# Altium PCB PCB1.PcbDoc
Units mm, origin at the board's own origin, x right, y up, seen from the top; angles counter-clockwise.
Board outline 119.76 x 74.42 mm, 2 copper layers (Top Layer, Bottom Layer); 30 components, 44 nets, 148 pads, 45 vias.
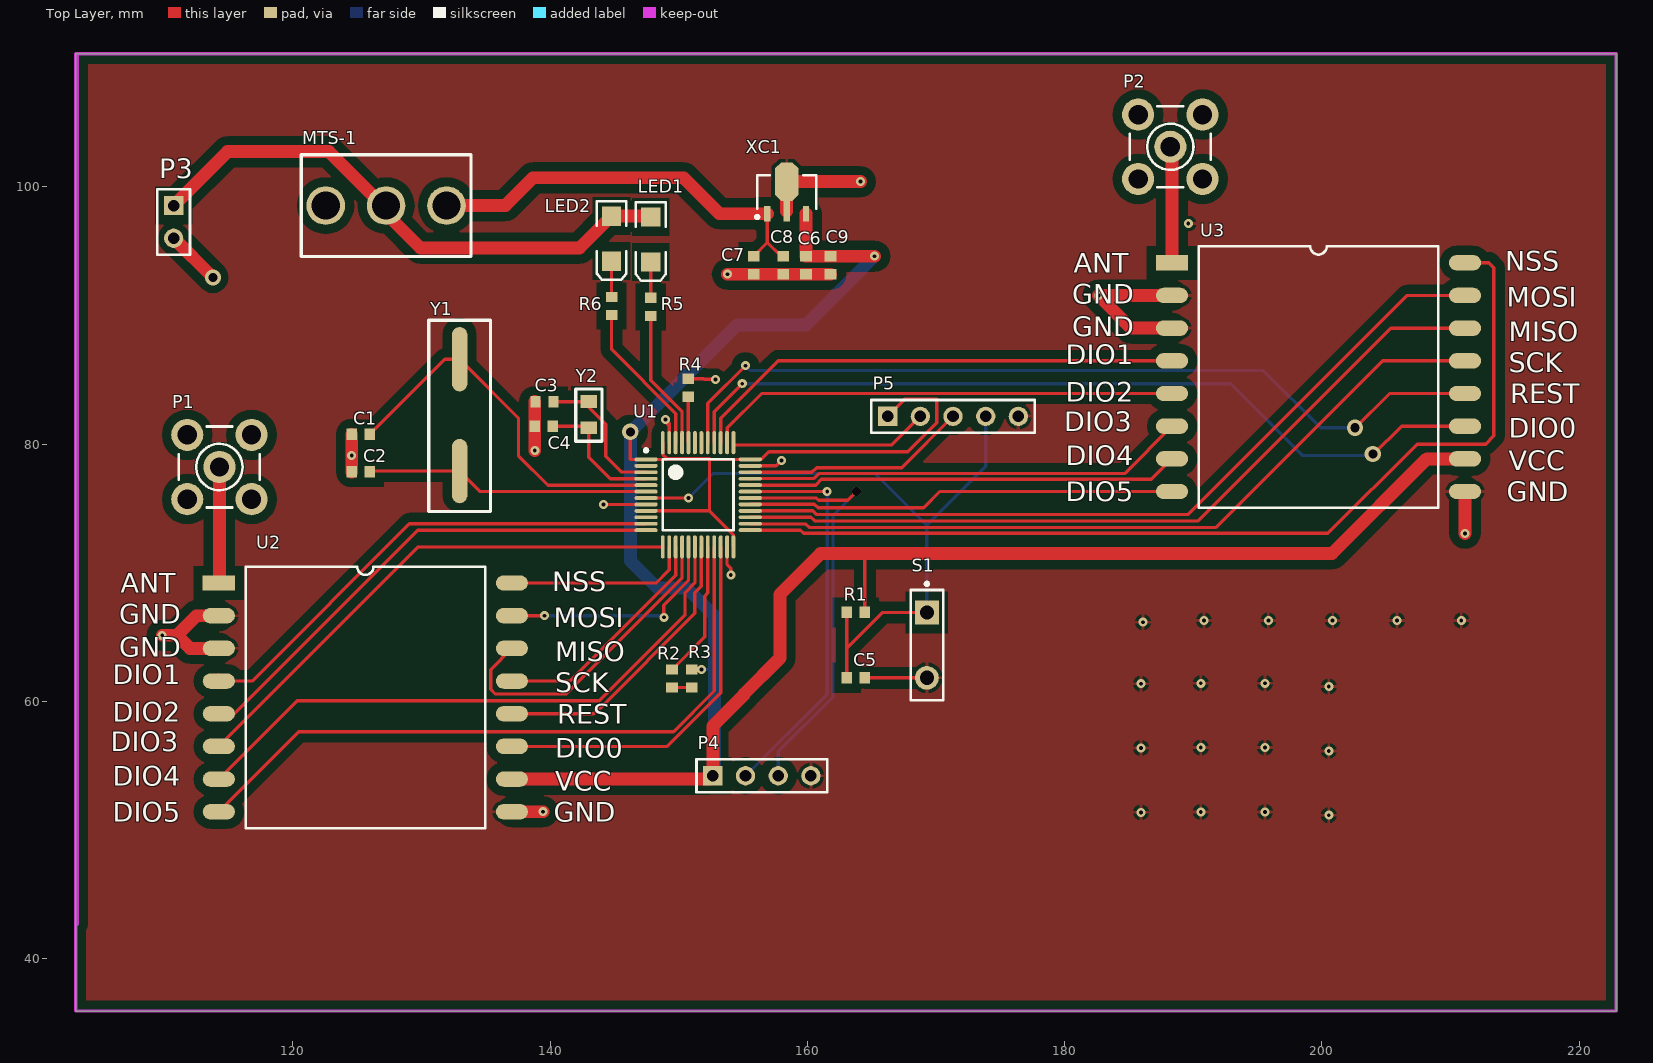
[diagram p0: Top Layer view]
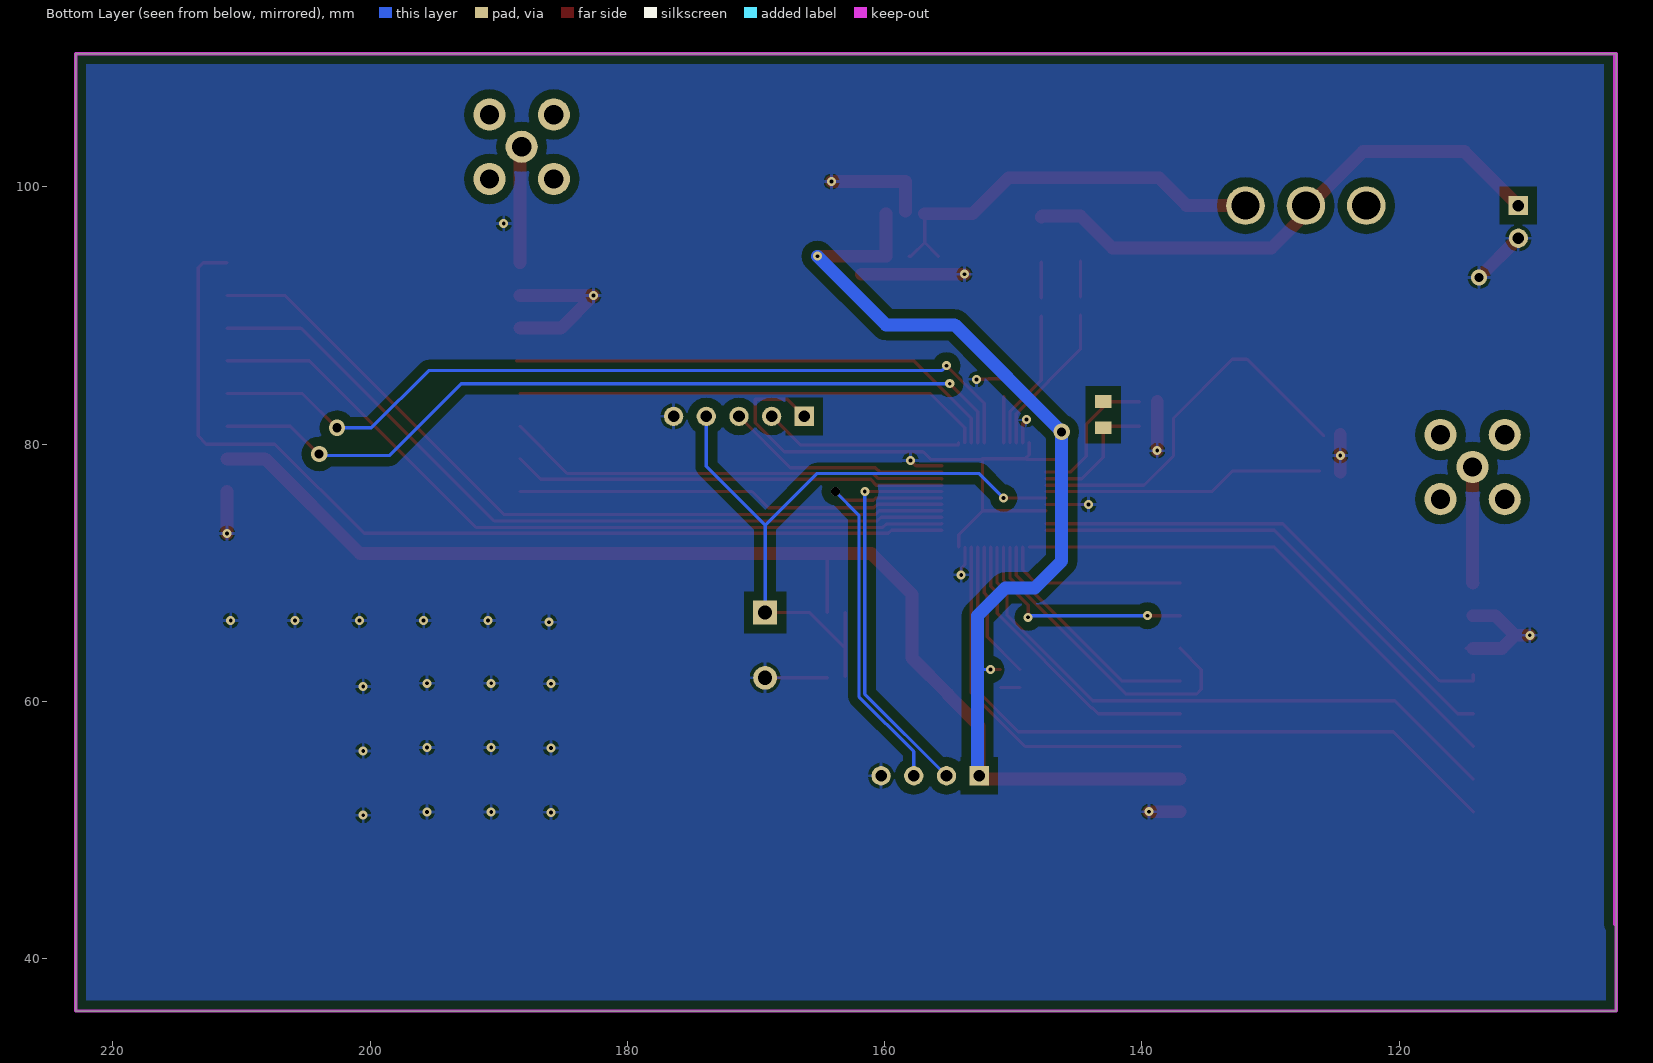
[diagram p1: Bottom Layer view, seen from below]

## Layer stack, top to bottom
Top Solder: solder mask 0.0102, Solder Resist, Dk 3.5
Top Layer: signal copper 0.0356
Dielectric 1: dielectric 0.32, FR-4, Dk 4.8
Bottom Layer: signal copper 0.0356
Bottom Solder: solder mask 0.0102, Solder Resist, Dk 3.5

## Board outline
103.124,35.941 222.885,35.941 222.885,110.363 103.124,110.363

## Design rules (kind name [scope] priority, off if disabled: settings)
Clearance [All] p1: gap=0.2 except(0.7: Arc-Poly Track-Poly SMDPad-Poly THPad-Poly Via-Poly Fill-Poly Poly-Poly)
PolygonConnect [All] p1: connectstyle=Relief reliefconductorwidth=0.254 reliefentries=4 polygonreliefangle="90 Angle" airgapwidth=0.254
RoutingVias [All] p1: holewidth=0.711 width=1.27 viastyle="Through Hole" minholewidth=0.711 minwidth=1.27 maxholewidth=0.711 maxwidth=1.27
SilkToSilkClearance [All] p1: silktosilkclearance=0.1
SilkToSolderMaskClearance [IsPad] p1: minsilkscreentomaskgap=0.1 clearancetoexposedcopper=TRUE
SolderMaskExpansion [All] p1: expansion=0.102
UnpouredPolygon [All] p1: allowunpoured=TRUE allowshelved=TRUE
Width [All] p1: maxlimit=2 minlimit=0.254 preferedwidth=0.254
27 further rules are at their usual default settings.

## Components (designator, comment, footprint, x,y, rotation, side; value= is the part's Value field where it differs from the comment)
C1 "Cap Semi" 1608[0603] 125.284,80.772 r0 top
C2 "Cap Semi" 1608[0603] 125.284,77.851 r0 top
C3 "Cap Semi" 1608[0603] 139.573,83.312 r0 top
C4 "Cap Semi" 1608[0603] 139.511,81.407 r0 top
C5 "Cap Semi" 1608[0603] 163.765,61.849 r0 top
C6 "Cap Semi" 1608[0603] 159.893,93.915 r90 top
C7 "Cap Semi" 1608[0603] 155.829,93.918 r90 top
C8 "Cap Semi" 1608[0603] 158.115,93.918 r90 top
C9 "Cap Semi" 1608[0603] 161.798,93.915 r90 top
LED1 "LED2" 3.2X1.6X1.1 147.828,95.913 r270 top
LED2 "LED2" 3.2X1.6X1.1 144.78,95.984 r270 top
MTS-1 "MTS-103" MTS-103 120.655,94.602 r0 top
P1 "SMB" SMB_V-RJ45 114.3,78.232 r0 top
P2 "SMB" SMB_V-RJ45 188.214,103.124 r0 top
P3 "Header 2" HDR1X2 110.744,98.552 r270 top
P4 "Header 4" HDR1X4 152.654,54.229 r0 top
P5 "Header 5" HDR1X5 166.243,82.169 r0 top
R1 "Res2" 1608[0603] 163.765,66.929 r180 top
R2 "Res2" 1608[0603] 149.479,61.787 r270 top
R3 "Res2" 1608[0603] 151.003,61.787 r90 top
R4 "Res2" 1608[0603] 150.749,84.393 r270 top
R5 "Res2" 1608[0603] 147.828,90.678 r270 top
R6 "Res2" 1608[0603] 144.78,90.74 r270 top
S1 "SW-PB" SPST-2 169.291,64.389 r270 top
U1 "STM32F103C8T6" LQFP48_N 151.511,76.073 r0 top
U2 "XL1276-D01" XL1278-DO1 114.253,69.215 r0 top
U3 "XL1276-D01" XL1278-DO1 188.341,94.107 r0 top
XC1 "XC6206P332MR" SOT89L 158.393,99.617 r90 top
Y1 "8M" HC-48SMD 130.569,88.614 r270 top
Y2 "32.768" FC135 142.252,83.912 r270 top

## Footprints (in the part's own frame and the unit in brackets; to place one, negate y for a bottom-side part, rotate by r counter-clockwise, add the part's x,y. Pads: shape width x height; smd on the part's side, far side on the other; paste and mask are expansions set on the pad)
3.2X1.6X1.1 [mm] "SMT LED; 2 Flat Leads"
  rect 1.5x1.5 smd: 1(-1.75,0) 2(1.75,0)
  silkscreen extent -2.9,-1.15 3.2,1.15
1608[0603] [mm] "Chip Capacitor, Body 1.6x0.8mm, IPC High Density"
  rect 0.8x0.9 smd: 1(-0.7,0) 2(0.7,0)
  body extent -0.87,-0.48 0.87,0.48, height 1.3
FC135 [mm]
  rect 1x1.3 all layers, no hole: 1(0.6,0.75) 2(2.632,0.75)
  silkscreen extent -0.38,-0.25 3.68,1.78
HC-48SMD [mm]
  oval 5x1.2 smd: 1(2,2.4) 2(10.7,2.4)
  silkscreen extent -1.02,0 13.84,4.8
HDR1X2 [mm] "Connector; Header; 2 Position"
  rect 1.5x1.5 hole 0.9: 1(0,0)
  round 1.5 hole 0.9: 2(2.54,0)
  silkscreen extent -1.27,-1.27 3.81,1.27
HDR1X4 [mm] "Connector; Header; 4 Position"
  rect 1.5x1.5 hole 0.9: 1(0,0)
  round 1.5 hole 0.9: 2(2.54,0) 3(5.08,0) 4(7.62,0)
  silkscreen extent -1.27,-1.27 8.89,1.27
HDR1X5 [mm] "Connector; Header; 5 Position"
  rect 1.5x1.5 hole 0.9: 1(0,0)
  round 1.5 hole 0.9: 2(2.54,0) 3(5.08,0) 4(7.62,0) 5(10.16,0)
  silkscreen extent -1.27,-1.27 11.43,1.27
LQFP48_N [mm] "Thin QFP, 48-Leads, Body 7x7mm, Pitch 0.5mm, IPC Medium Density"
  oval 1.8x0.3 smd: 1(-4.05,2.75) 2(-4.05,2.25) 3(-4.05,1.75) 4(-4.05,1.25) 5(-4.05,0.75) 6(-4.05,0.25) 7(-4.05,-0.25) 8(-4.05,-0.75) 9(-4.05,-1.25) 10(-4.05,-1.75) 11(-4.05,-2.25) 12(-4.05,-2.75) 25(4.05,-2.75) 26(4.05,-2.25) 27(4.05,-1.75) 28(4.05,-1.25) 29(4.05,-0.75) 30(4.05,-0.25) 31(4.05,0.25) 32(4.05,0.75) 33(4.05,1.25) 34(4.05,1.75) 35(4.05,2.25) 36(4.05,2.75)
  oval 0.3x1.8 smd: 13(-2.75,-4.05) 14(-2.25,-4.05) 15(-1.75,-4.05) 16(-1.25,-4.05) 17(-0.75,-4.05) 18(-0.25,-4.05) 19(0.25,-4.05) 20(0.75,-4.05) 21(1.25,-4.05) 22(1.75,-4.05) 23(2.25,-4.05) 24(2.75,-4.05) 37(2.75,4.05) 38(2.25,4.05) 39(1.75,4.05) 40(1.25,4.05) 41(0.75,4.05) 42(0.25,4.05) 43(-0.25,4.05) 44(-0.75,4.05) 45(-1.25,4.05) 46(-1.75,4.05) 47(-2.25,4.05) 48(-2.75,4.05)
  silkscreen extent -4.17,-2.75 2.75,3.57, body extent -3.5,-3.5 3.5,3.5, height 1.6
MTS-103 [mm]
  round 3 hole 2.2: 1(1.9,3.95) 2(6.599,3.95) 3(11.298,3.95)
  silkscreen extent 0,0 13.2,7.9
SMB_V-RJ45 [mm] "Connector; SMB Straight"
  round 2.5 hole 1.5: 1(0,0) 2(-2.5,-2.5) 2(-2.5,2.5) 2(2.5,-2.5) 2(2.5,2.5)
  silkscreen extent -3.15,-3.15 3.15,3.15
SOT89L [mm] "SOT89, 3-Leads, Body 4.5x2.4 mm, Pitch 1.5mm, Lead Span 4.1mm, IPC High Density"
  rect 1.2x0.5 smd: 1(-1.7,1.5) 3(-1.7,-1.5)
  rect 1.6x0.5 smd: 2(-1.5,0)
  oct 3x1.8 smd: 2(0.8,0)
  silkscreen extent -2.07,-2.3 1.3,2.42, body extent -1.3,-2.3 1.3,2.3, height 1.6
SPST-2 [mm] "Switch; 2 Leads"
  rect 1.85x1.85 hole 1.1: 1(-2.54,0)
  round 1.85 hole 1.1: 2(2.54,0)
  silkscreen extent -4.89,-1.27 4.28,1.27
XL1278-DO1 [mm]
  rect 2.5x1.2 smd: 1(0,0)
  oval 2.5x1.2 smd: 2(0,-2.54) 3(0,-5.08) 4(0,-7.62) 5(0,-10.16) 6(0,-12.7) 7(0,-15.24) 8(0,-17.78) 9(22.78,-17.78) 10(22.78,-15.24) 11(22.78,-12.7) 12(22.78,-10.16) 13(22.78,-7.62) 14(22.78,-5.08) 15(22.78,-2.54) 16(22.78,0)
  silkscreen extent 2.08,-19.05 20.7,1.27

## Part data
C1 C2 C3 C4 C5 C6 C7 C8 C9: "Capacitor (Semiconductor SIM Model)"
LED1 LED2: "Typical RED, GREEN, YELLOW, AMBER GaAs LED"
P1 P2: "SMB Straight Connector"
P3: "Header, 2-Pin"
P4: "Header, 4-Pin"
P5: "Header, 5-Pin"
R1 R2 R3 R4 R5 R6: "Resistor"
S1: "Switch"
U1: "STM32 ARM-based 32-bit MCU with 64 Kbytes Flash, 48-pin LQFP, Industrial Temperature"
XC1: library part "Volt Reg", "Voltage Regulator"
Y1 Y2: library part XTAL, "Crystal Oscillator"

## Via types
v1: diameter 0.7, hole 0.3, Top Layer to Bottom Layer, 40 vias
v2: diameter 1.27, hole 0.711, Top Layer to Bottom Layer, 3 vias
v3: diameter 0.7, hole 0.7, Top Layer to Bottom Layer, 1 vias
v4: diameter 1.25, hole 0.7, Top Layer to Bottom Layer, 1 vias

## Nets (pads, with @x,y where several pads share a name; then routed paths per layer and width w, separated by ;. In a path a pad name is that pad's centre, name@x,y a point inside that pad or via, vN(x,y) a via of type N, cw(c..) or ccw(c..) an arc to the next point about the centre after c; other vN are vias at no path point)
3.3V: C6.2 C9.2 P4.1 P5.1 R1.1 R3.2 U1.1 U1.9 U1.24 U1.36 U1.48 U2.10 U3.10 XC1.3 | length 207.5
  Top Layer w0.254: v2(146.24,80.962) 146.24,78.823 U1.1 148.99,78.823 149.034,78.867 152.386,78.867 ; U1.9 152.386,74.823 ; U1.48 148.761,79.198 149.063,78.896 ; R3.2 v1(151.762,62.487) ; 152.386,78.882 152.386,78.867 ; U1.24 154.238,72.046 154.238,72.971 152.386,74.823 ; 164.338,71.501 164.465,71.374 R1.1 ; P5.1 167.567,83.493 170.053,83.493 170.053,81.661 167.809,79.417 157.014,79.417 156.42,78.823 U1.36 152.444,78.823 152.4,78.867 152.386,78.867 ; 152.386,74.823 152.386,78.867
  Top Layer w1: U2.10 152.4,53.975 P4.1 152.654,58.104 155.074,60.524 155.074,60.586 157.861,63.373 157.861,68.326 161.036,71.501 164.338,71.501 200.787,71.501 208.153,78.867 U3.10 ; XC1.3 C6.2 C9.2 v1(165.227,94.615)
  Bottom Layer w0.254: v1(151.762,62.487) 152.778,62.487 152.781,62.484 ; v1@165.1,94.615 v1(165.227,94.615)
  Bottom Layer w1: P4.1 152.781,54.356 152.781,62.484 152.781,66.675 150.622,68.834 148.336,68.834 146.24,70.929 v2(146.24,80.962) 154.559,89.281 159.893,89.281 v1(165.227,94.615)
+5V: LED1.1 LED2.1 MTS-1.2 P3.1 | length 43.2
  Top Layer w1: P3.1 114.935,102.743 122.809,102.743 126.619,98.933 126.619,98.552 129.921,95.25 142.296,95.25 LED2.1 147.757,97.734 LED1.1
ANT1: P2.1 U3.1 | length 9.1
  Top Layer w1: P2.1 188.341,102.997 U3.1
ANT2: P1.1 U2.1 | length 9
  Top Layer w1: U2.1 114.3,69.262 P1.1
DIO0: U1.40 U3.11 | length 65.1
  Top Layer w0.254: U1.40 152.761,82.53 v1(154.94,84.709) ; v2(203.962,79.248) 203.962,79.168 206.201,81.407 U3.11
  Bottom Layer w0.254: v1(154.94,84.709) 192.913,84.709 198.501,79.121 203.962,79.121 v2(203.962,79.248)
DIO1: U1.39 U3.4 | length 39.1
  Top Layer w0.254: U1.39 153.261,82.014 157.734,86.487 U3.4 U3.4@188.595,86.487
DIO2: U1.38 U3.5 | length 36.8
  Top Layer w0.254: U1.38 153.784,80.146 153.784,81.288 156.443,83.947 U3.5
DIO3: U1.33 U3.6 | length 34.5
  Top Layer w0.254: U1.33 155.584,77.346 160.524,77.346 160.902,77.724 184.658,77.724 U3.6
DIO4: U1.32 U3.7 | length 33.6
  Top Layer w0.254: U1.32 160.643,76.823 161.09,77.27 186.744,77.27 U3.7
DIO5: U1.29 U3.8 | length 33.4
  Top Layer w0.254: U1.29 155.584,75.346 160.545,75.346 160.834,75.057 169.037,75.057 170.307,76.327 U3.8
DIO7: U1.22 U2.11 | length 29.3
  Top Layer w0.254: U2.11 149.098,56.515 153.261,60.678 U1.22
DIO8: U1.11 U2.4 | length 38.8
  Top Layer w0.254: U2.4@114.253,62.103 U2.4 116.84,61.595 129.068,73.823 U1.11
DIO9: U1.12 U2.5 | length 39.1
  Top Layer w0.254: U2.5 115.443,59.055 129.711,73.323 U1.12
DIO10: U1.13 U2.6 | length 40.9
  Top Layer w0.254: U2.6 129.761,72.023 U1.13
DIO11: U1.18 U2.7 | length 47.1
  Top Layer w0.254: U2.7 120.349,60.071 143.828,60.071 150.495,66.738 150.495,68.453 151.261,69.219 U1.18
DIO12: U1.21 U2.8 | length 53.6
  Top Layer w0.254: U2.8 120.476,57.658 149.599,57.658 152.761,60.82 U1.21
GND: C1.1 C2.1 C3.1 C4.1 C5.2 C6.1 C7.1 C8.1 C9.1 P3.2 P4.4 P5.5 R4.1 S1.2 U1.8 U1.23 U1.35 U1.47 U2.2 U2.3 U2.9 U3.2 U3.3 U3.9 XC1.2 | length 71.7
  Top Layer w0.254: U2.3 U2.3@114.808,64.135 ; v1(144.157,75.323) U1.8 ; v1(148.971,81.915) 148.971,81.733 149.17,81.534 149.261,81.625 U1.47 ; R4.1 151.929,85.093 151.977,85.045 v1(152.863,85.045) ; U1.23 153.761,70.648 154.051,70.358 v1(154.051,69.85) ; U1.35 157.571,78.323 v1(157.988,78.74) ; C5.2 S1.2
  Top Layer w1: v1(109.855,65.151) 110.998,65.151 ; P3.2 v4(113.792,92.964) ; U2.3 112.014,64.135 110.998,65.151 ; U2.2 112.522,66.675 110.998,65.151 ; C2.1 v1(124.584,79.121) C1.1 ; U2.9 v1(139.446,51.435) ; C3.1@138.808,83.312 138.808,81.41 C4.1 v1(138.811,79.502) ; v1(153.797,93.218) C7.1 C8.1 161.795,93.218 C9.1 ; XC1.2@158.393,98.117 158.393,100.417 v1(164.124,100.417) ; U3.3 185.166,89.027 v1(182.626,91.567) U3.2 ; v1(211.121,73.072) U3.9
  other v1: 200.533,51.167 185.928,51.388 190.58,51.421 195.58,51.421 200.533,56.167 185.928,56.388 190.58,56.421 195.58,56.421 200.533,61.167 185.928,61.388 190.58,61.421 195.58,61.421 186.088,66.167 190.834,66.294 195.834,66.294 200.834,66.294 205.834,66.294 210.834,66.294 189.611,97.155
LED1: R5.2 U1.45 | length 10.9
  Top Layer w0.254: R5.2 147.828,84.97 150.261,82.537 U1.45
LED2: R6.2 U1.46 | length 12
  Top Layer w0.254: R6.2 144.78,87.376 149.775,82.381 149.775,80.137 U1.46
NetC7_2: C7.2 C8.2 MTS-1.3 XC1.1 | length 32.4
  Top Layer w0.254: C7.2 156.893,95.682 ; XC1.1 156.893,95.682 ; C8.2 157.957,94.618 156.893,95.682
  Top Layer w1: MTS-1.3 136.525,98.552 138.684,100.711 150.368,100.711 153.162,97.917 XC1.1
NetLED1_2: LED1.2 R5.1 | length 2.8
  Top Layer w0.254: R5.1 LED1.2
NetLED2_2: LED2.2 R6.1 | length 2.8
  Top Layer w0.254: R6.1 LED2.2
NetR2_1: R2.1 U1.20 | length 10.7
  Top Layer w0.254: R2.1 152.019,65.027 152.019,68.199 152.261,68.441 U1.20
NetR2_2: R2.2 R3.1 | length 1.5
  Top Layer w0.254: R2.2 R3.1
NetR4_2: R4.2 U1.44 | length 3.6
  Top Layer w0.254: R4.2 150.749,80.135 U1.44
OSC32_IN: C3.2 U1.3 Y2.1 | length 11.2
  Top Layer w0.254: C3.2@140.208,83.312 C3.2 142.974,83.312 142.974,82.92 144.333,81.561 144.333,79.055 145.542,77.846 147.438,77.846 U1.3
OSC32_OUT: C4.2 U1.4 Y2.2 | length 10.3
  Top Layer w0.254: C4.2 142.875,81.407 Y2.2 143.002,78.994 144.673,77.323 U1.4
OSC_IN: C1.2 U1.5 Y1.1 | length 29.8
  Top Layer w0.254: C1.2@125.857,80.645 C1.2 131.826,86.614 Y1.1 137.541,82.042 137.541,79.121 139.839,76.823 U1.5
OSC_OUT: C2.2 U1.6 Y1.2 | length 21.9
  Top Layer w0.254: C2.2@126.178,77.914 Y1.2 134.56,76.323 U1.6
RESET: C5.1 P5.4 R1.2 S1.1 U1.7 | length 53.8
  Top Layer w0.254: U1.7 147.457,75.819 v1(150.749,75.819) ; C5.1@163.065,61.976 163.065,64.135 ; R1.2 163.065,64.135 ; S1.1 165.859,66.929 163.065,64.135
  Bottom Layer w0.254: v1(150.749,75.819) 152.654,77.724 165.27,77.724 169.291,73.703 ; S1.1 169.291,73.703 ; P5.4 173.863,78.275 169.291,73.703
RF1_REST: U1.19 U2.12 | length 22.8
  Top Layer w0.254: U2.12 143.383,59.055 143.818,59.49 143.889,59.49 151.257,66.858 151.257,68.453 151.761,68.957 U1.19
RF2_REST: U1.41 U3.12 | length 66.3
  Top Layer w0.254: U1.41 152.261,83.173 v1(155.194,86.106) ; v2(202.565,81.28) 202.565,81.233 205.279,83.947 U3.12
  Bottom Layer w0.254: v1(155.194,86.106) 155.575,85.725 195.453,85.725 199.898,81.28 v2(202.565,81.28)
RX1: P4.2 U1.31 | length 30.9
  Top Layer w0.254: U1.31 155.565,76.327 v1(161.544,76.327)
  Bottom Layer w0.254: P4.2 161.544,60.579 v1(161.544,76.327) v1@161.417,76.2
SPI1_MISO: U1.16 U2.14 | length 25
  Top Layer w0.254: U2.14 135.382,62.484 135.382,60.957 135.76,60.579 141.224,60.579 150.261,69.616 U1.16
SPI1_MOSI: U1.17 U2.15 | length 18.2
  Top Layer w0.254: U2.15 v1(139.573,66.675) ; v1(148.844,66.548) 148.844,67.501 150.761,69.418 U1.17
  Bottom Layer w0.254: v1(139.573,66.675) 148.844,66.675 v1(148.844,66.548)
SPI1_NSS: U1.14 U2.16 | length 14.4
  Top Layer w0.254: U2.16 148.245,69.215 149.261,70.231 U1.14
SPI1_SCK: U1.15 U2.13 | length 18.3
  Top Layer w0.254: U2.13 141.541,61.595 149.761,69.815 U1.15
SPI2_MISO: U1.27 U3.14 | length 61.9
  Top Layer w0.254: U1.27 160.283,74.323 160.565,74.041 190.373,74.041 205.359,89.027 U3.14
SPI2_MOSI: U1.28 U3.15 | length 62.7
  Top Layer w0.254: U1.28 160.425,74.823 160.699,74.549 189.611,74.549 206.629,91.567 U3.15
SPI2_NSS: U1.25 U3.16 | length 76.5
  Top Layer w0.254: U1.25 159.468,73.323 159.712,73.079 200.46,73.079 207.391,80.01 212.725,80.01 213.36,80.645 213.36,93.726 212.979,94.107 U3.16
SPI2_SCK: U1.26 U3.13 | length 61
  Top Layer w0.254: U1.26 155.584,73.8 159.88,73.8 160.147,73.533 191.77,73.533 204.724,86.487 U3.13
SWCLK: P5.2 U1.37 | length 15.6
  Top Layer w0.254: U1.37 154.261,79.949 166.563,79.949 P5.2
SWDIO: P5.3 U1.34 | length 17.6
  Top Layer w0.254: U1.34 160.359,77.823 160.714,78.178 167.332,78.178 P5.3
TX1: P4.3 U1.30 | length 33.2
  Top Layer w0.254: U1.30 160.71,75.823 160.883,75.65 163.153,75.65 v3(163.83,76.327)
  Bottom Layer w0.254: P4.3 157.734,56.127 161.998,60.391 161.998,74.495 v3(163.83,76.327)
pads on no net: MTS-1.1 P1.2 P2.2 U1.2 U1.10 U1.42 U1.43

## Polygon pours and split planes (outlines as drawn)
GND on Top Overlay "Bottom Layer-No Net" (solid, remove dead copper): 103.251,110.109 103.505,110.363 222.631,110.363 222.631,36.195 222.504,36.068 222.377,35.941 103.124,35.941 103.124,109.855 103.251,109.982
GND on Top Layer "Bottom Layer-No Net" (solid, remove dead copper, pour order 10): 103.251,110.363 222.504,110.363 222.504,35.941 221.869,36.576 103.124,36.576 103.124,109.982 103.505,110.363
GND on Bottom Layer "Bottom Layer-No Net" (solid, remove dead copper, pour order 12): 103.251,110.363 103.759,109.855 222.885,109.855 222.885,36.703 222.631,36.449 103.124,36.449 103.124,109.855 103.632,110.363

## Keep-outs
Keep-Out Layer:
  lines w0.254: 103.251,42.672 103.251,110.363 ; 103.124,35.941 103.124,110.363 222.885,110.363 222.885,35.941 103.124,35.941

## Silkscreen, mask and mechanical layers (free items; w line width, h text height)
Mechanical 1:
  circle w0.254: c108.585,105.283 r2
  circle w0.254: c215.773,105.664 r2
  circle w0.254: c213.741,54.61 r2

## Text inside footprints (layer, text, board x,y; h text height)
U2: Top Overlay "ANT" at 106.633,68.453 h1.52; Top Overlay "GND" at 106.506,66.04 h1.52; Top Overlay "GND" at 106.506,63.5 h1.52; Top Overlay "DIO1" at 105.998,61.341 h1.52; Top Overlay "DIO2" at 105.998,58.42 h1.52; Top Overlay "DIO3" at 105.871,56.134 h1.52; Top Overlay "DIO4" at 105.998,53.467 h1.52; Top Overlay "DIO5" at 105.998,50.673 h1.52; Top Overlay "NSS" at 140.161,68.58 h1.52; Top Overlay "MISO" at 140.415,63.119 h1.52; Top Overlay "MOSI" at 140.288,65.786 h1.52; Top Overlay "SCK" at 140.415,60.706 h1.52; Top Overlay "REST" at 140.542,58.293 h1.52; Top Overlay "DIO0" at 140.415,55.626 h1.52; Top Overlay "VCC" at 140.415,53.086 h1.52; Top Overlay "GND" at 140.288,50.673 h1.52
U3: Top Overlay "ANT" at 180.721,93.345 h1.52; Top Overlay "GND" at 180.594,90.932 h1.52; Top Overlay "GND" at 180.594,88.392 h1.52; Top Overlay "DIO1" at 180.086,86.233 h1.52; Top Overlay "DIO2" at 180.086,83.312 h1.52; Top Overlay "DIO3" at 179.959,81.026 h1.52; Top Overlay "DIO4" at 180.086,78.359 h1.52; Top Overlay "DIO5" at 180.086,75.565 h1.52; Top Overlay "NSS" at 214.249,93.472 h1.52; Top Overlay "MISO" at 214.503,88.011 h1.52; Top Overlay "MOSI" at 214.376,90.678 h1.52; Top Overlay "SCK" at 214.503,85.598 h1.52; Top Overlay "REST" at 214.63,83.185 h1.52; Top Overlay "DIO0" at 214.503,80.518 h1.52; Top Overlay "VCC" at 214.503,77.978 h1.52; Top Overlay "GND" at 214.376,75.565 h1.52